# Altium PCB CAN-to-CAN.PcbDoc
Units mil, origin at the board's own origin, x right, y up, seen from the top; angles counter-clockwise.
Board outline 4580 x 2040 mil, 4 copper layers (Top Layer, GND, +5V, Bottom Layer), stack 23.756 mil thick; 112 components, 87 nets, 365 pads, 138 vias.
Unrouted connection lines stored in the file: 3.
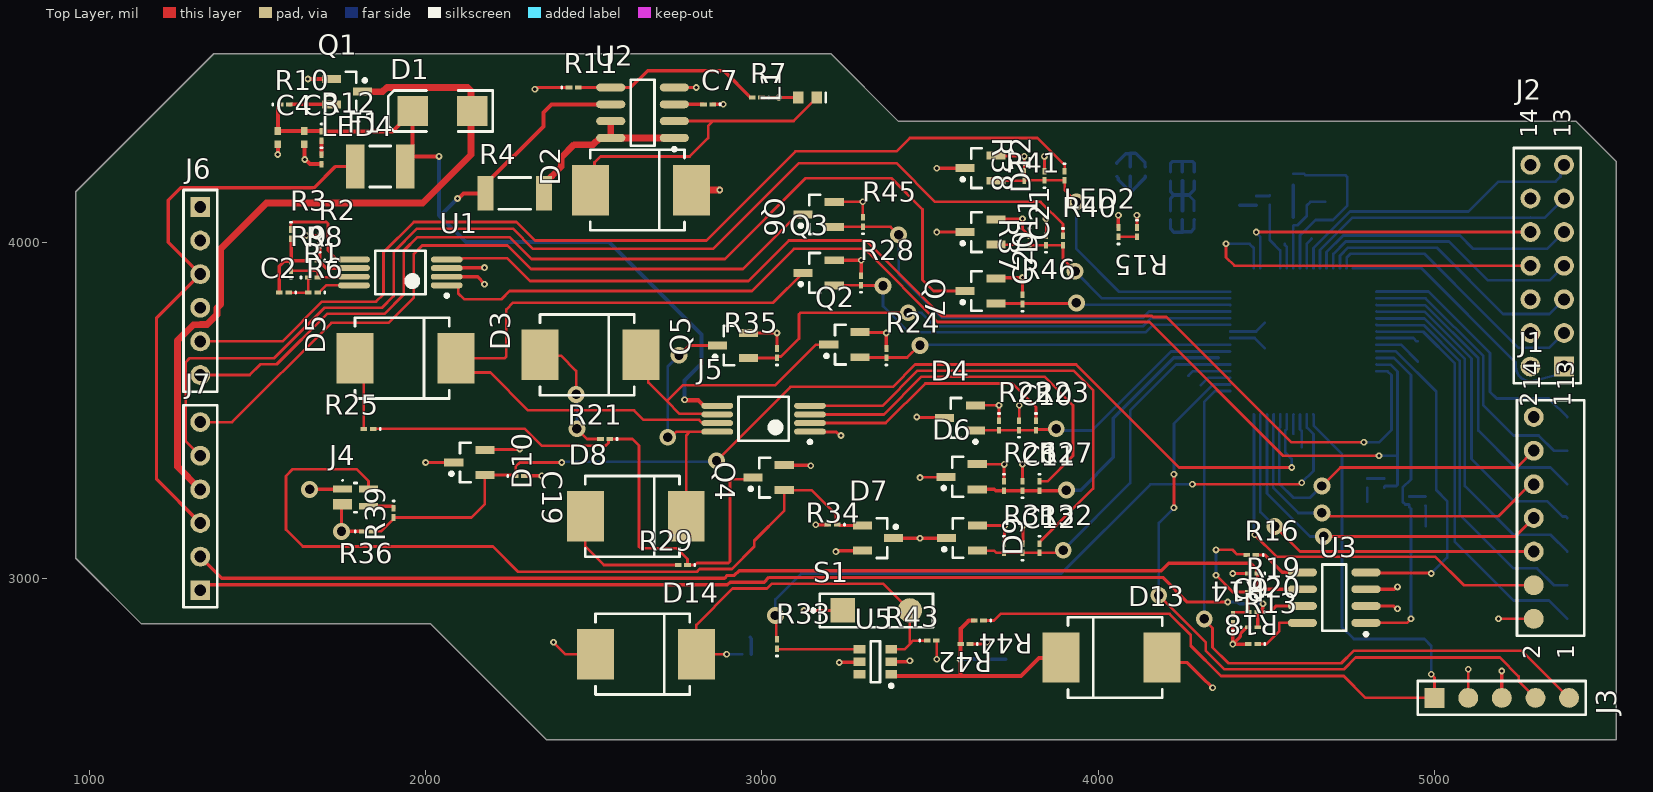
[diagram p0: Top Layer view]
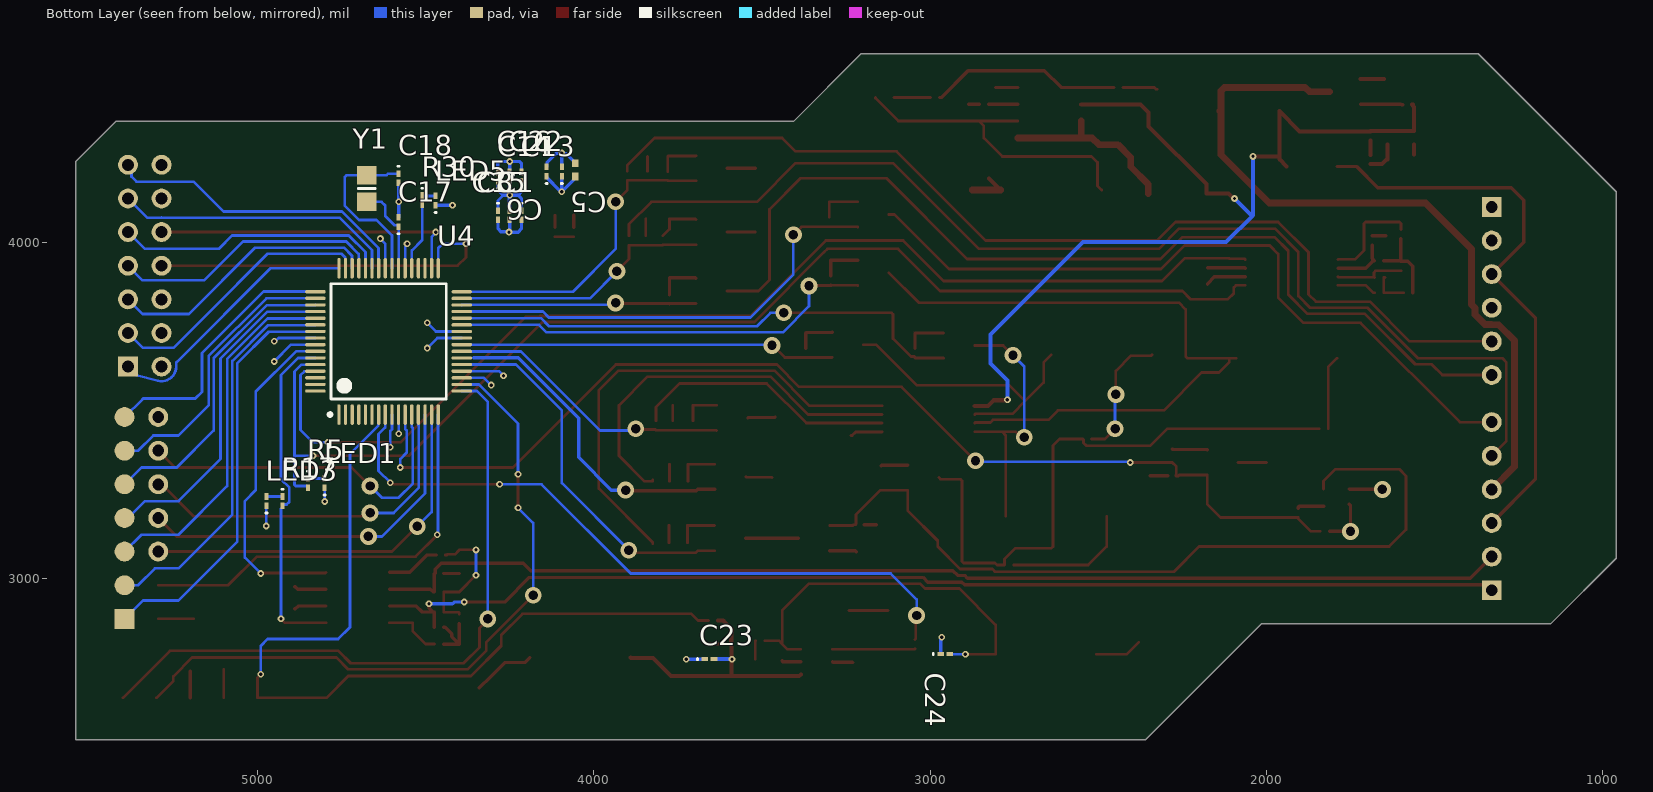
[diagram p1: Bottom Layer view, seen from below]
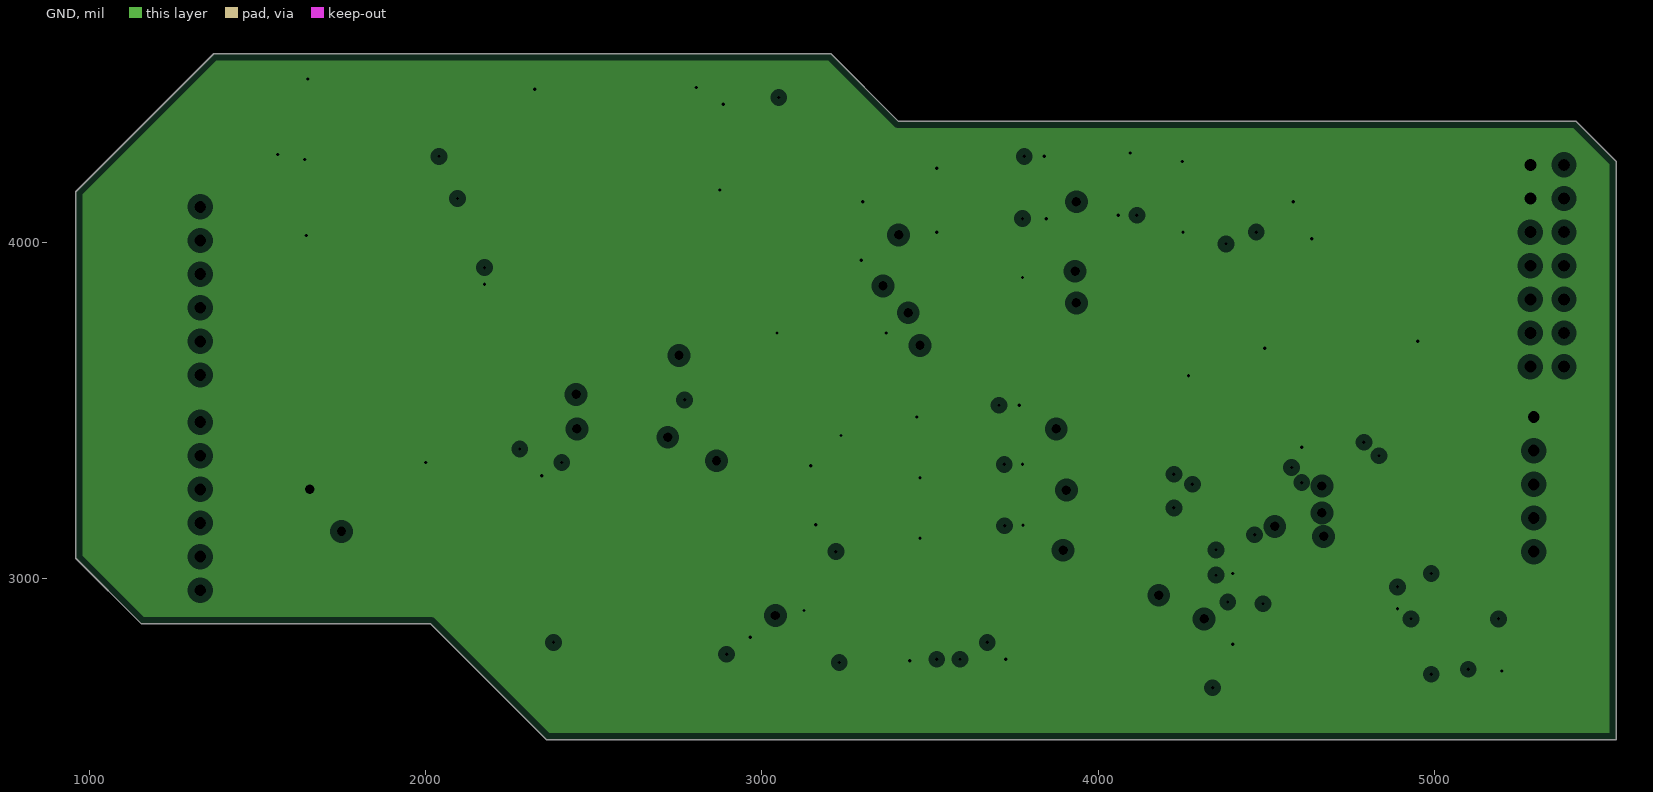
[diagram p2: GND, clearances drawn from the general rule]
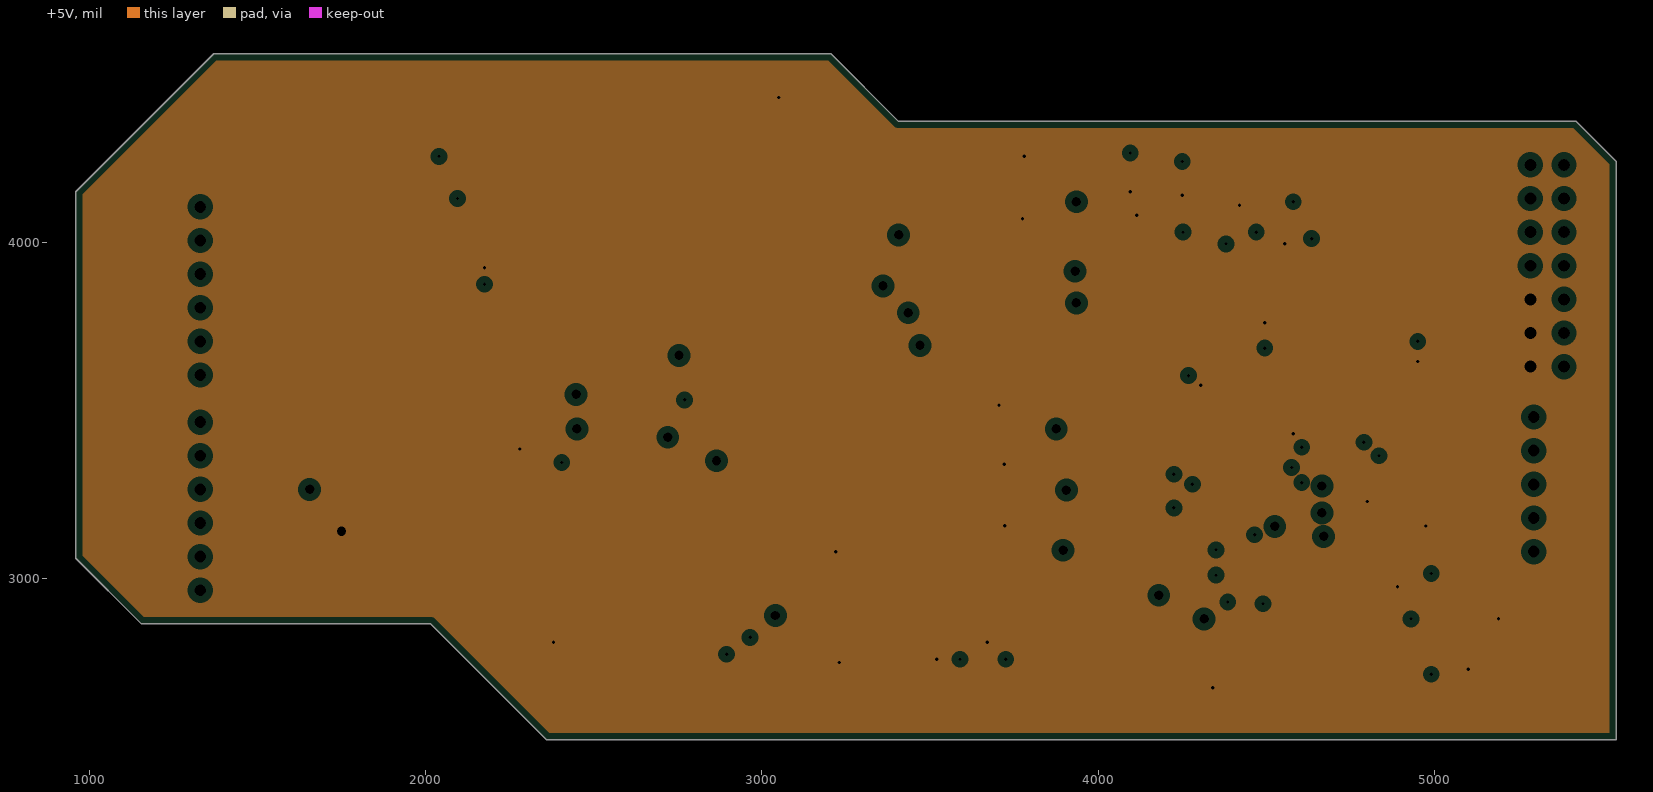
[diagram p3: +5V, clearances drawn from the general rule]

## Layer stack, top to bottom
Top Solder: solder mask 0.4, Solder Resist, Dk 3.5
Top Layer: signal copper 1.4
Dielectric 2: prepreg 2.8, PP-006, Dk 4.1
GND: plane copper 1.3779, net GND
Dielectric 1: dielectric 12.6, FR-4, Dk 4.8
+5V: plane copper 1.3779, net +5V
Dielectric 3: prepreg 2.8, PP-006, Dk 4.1
Bottom Layer: signal copper 1.4
Bottom Solder: solder mask 0.4, Solder Resist, Dk 3.5

## Board outline
1155,2865 960,3060 960,4150 1370,4560 3205,4560 3405,4360 5420,4360 5540,4240 5540,2520 2360,2520 2015,2865

## Design rules (kind name [scope] priority, off if disabled: settings)
Clearance [All] p1: gap=10 ignorepadtopadclearanceinfootprint=FALSE except(0: Arc-Hole Track-Hole SMDPad-Hole THPad-Hole Via-Hole Fill-Hole Poly-Hole Region-Hole Text-Hole)
PlaneClearance [All] p1: clearance=20
PlaneConnect [All] p1: planeconnectstyle=Relief reliefexpansion=20 reliefentries=4 reliefconductorwidth=10 reliefairgap=10
PolygonConnect [All] p1: connectstyle=Relief reliefconductorwidth=10 reliefentries=4 polygonreliefangle="90 Angle" airgapwidth=10
RoutingVias [All] p1: holewidth=28 width=50 viastyle="Through Hole" minholewidth=28 minwidth=50 maxholewidth=28 maxwidth=50
SolderMaskExpansion [All] p1: expansion=4 istentingtop=FALSE
Width [All] p1: maxlimit=30 minlimit=5 preferedwidth=10 minimp=50.000000 maximp=50.000000 favimp=50.000000
28 further rules are at their usual default settings.

## Components (designator, comment, footprint, x,y, rotation, side; value= is the part's Value field where it differs from the comment)
C1 "100n" 0603 4285,4080 r270 bottom
C2 "4n7" 0603 1578.78,3850 r180 top value=100n
C3 "100n" 0402 1639.55,4310.77 r270 top
C4 "10u/16" 0402 1560.74,4310.77 r270 top value=470u/16
C5 "100u/6V3" 0402 4055,4215 r90 bottom value=470u/16
C6 "100n" 0603 4250,4195 r90 bottom
C7 "100p" 0603 2840,4410 r180 top value=100pF
C8 "100n" 0603 4250,4080 r270 bottom
C9 "4n7" 0603 4400,2880 r90 top value=100n
C10 "100n" 0603 3765,3455 r90 top
C11 "100n" 0603 3775,3275 r90 top
C12 "100n" 0603 3775,3090 r90 top
C13 "100n" 0603 4215,4195 r90 bottom
C14 "100n" 0603 4285,4195 r90 bottom
C15 "100n" 0603 4215,4080 r270 bottom
C16 "100n" 0603 4140,4210 r90 bottom
C17 "27p" 0603 4580,4060 r90 bottom value=100n
C18 "27p" 0603 4580,4190 r270 bottom value=100n
C19 "100n" 0603 2280,3305 r0 top
C20 "100n" 0603 3845,4005 r90 top
C21 "100n" 0603 3840,4197.44 r90 top
C22 "100n" 0603 4095,4210 r90 bottom
C23 "100n" 0603 3656.22,2760 r180 bottom
C24 "10n" 0603 2955,2775 r180 bottom value=100pF
D1 "P6SMB15A" SMB 2050,4390 r180 top
D2 "LL5817" DIODE_SMC 2640,4155 r180 top
D3 "LL4148" DIODE_SMC 2490,3665 r180 top
D4 "BAT54S" SOT-23_M 3588.74,3477.4 r180 top
D5 "LL4148" DIODE_SMC 1940,3655 r180 top
D6 "BAT54S" SOT23_M#1 3593.74,3302.4 r180 top
D7 "BAT54S" SOT23_M#1 3345,3120 r0 top
D8 "LL4148" DIODE_SMC 2625,3185 r180 top
D9 "BAT54S" SOT23_M#1 3595,3120.25 r180 top
D10 "BAT54S" SOT23_M#1 2130,3345 r180 top
D11 "BAT54S" SOT23_M#1 3650,4030 r180 top
D12 "BAT54S" SOT23_M#1 3650,4220 r180 top
D13 "LL4148" DIODE_SMC 4040,2765 r0 top
D14 "LL4448" DIODE_SMC 2655,2775 r180 top
F1 "Fuse 1" 1812 1865,4225 r0 top
J1 "Header 7X2" HDR2X7#1 5395,2880 r90 top
J2 "Header 7X2" HDR2X7#2 5385,3630 r90 top
J3 "ZL201" HDR1X5 5000,2645 r0 top
J4 "MX-43045-0400" SOT-343_M 1791.62,3240.59 r0 top
J5 "MX-43045-0800" DB008_M 3005,3475 r180 top
J6 "MX-43045-0600" HDR1X6 1330,4105 r270 top
J7 "MX-43045-0600" HDR1X6 1330,2965 r90 top
L1 "DL22-330" INDC1608L 3135,4430 r180 top value=100uH
LED1 "HCL-1904AYL" 0603 4800,3283.78 r90 bottom
LED2 "HCL-1903BG4" 0603 4115,4030 r270 top
LED3 "HCL-1906BR1" 0603 4973.09,3230 r90 bottom
LED4 "HCL-1904AYL" 0603 1690.74,4245.77 r270 top
LED5 "HCL-1906BR1" 0603 4470,4123.78 r90 bottom
Q1 "BSS138" SOT23_M#2 1766.26,4447.4 r0 top
Q2 "BSS123" SOT23_M#1 3245,3695.25 r180 top
Q3 "BSS123" SOT23_M#1 3168.74,3908.82 r180 top
Q4 "BSS123" SOT23_M#1 3020,3300 r180 top
Q5 "BSS123" SOT23_M#1 2913.74,3692.65 r180 top
Q6 "BSS123" SOT23_M#1 3168.74,4082.4 r180 top
Q7 "BSS123" SOT23_M#1 3650,3855 r180 top
R1 "CAN0001" 0603 1665,3895 r0 top
R2 "CAN0001" 0603 1685,4005 r90 top
R3 "nc" 0603 1600,4023.78 r270 top value=1K
R4 "1R" 12Z-2010 2265,4145 r180 top value=1K
R5 "4k7" 0603 4850,3283.78 r270 bottom value=1K
R6 "1k" 0603 1665,3850 r180 top value=1K
R7 "3k6 1%" 0603 2985,4430 r180 top value=1K
R8 "68" 0603 1665,3945 r180 top value=1K
R9 "68" 0603 1600,3928.78 r90 top value=1K
R10 "1M" 0603 1581.22,4408.81 r0 top value=1K
R11 "1k2 1%" 0603 2440,4460 r0 top value=1K
R12 "4k7" 0603 1690.74,4315.77 r270 top value=1K
R13 "CAN0001" 0603 4460,2855 r0 top
R14 "CAN0001" 0603 4460,3015 r180 top
R15 "1k8" 0603 4060,4030 r90 top value=1K
R16 "nc" 0603 4455,3070 r180 top value=1K
R17 "4k7" 0603 4925,3230 r270 bottom value=1K
R18 "1k" 0603 4460,2805 r180 top value=1K
R19 "68" 0603 4460,2960 r180 top value=1K
R20 "68" 0603 4460,2900 r180 top value=1K
R21 "10k" 0603 2533.78,3415 r180 top value=1K
R22 "10k" 0603 3705,3455 r270 top value=1K
R23 "1k" 0603 3815,3455 r270 top value=1K
R24 "4k7" 0603 3370,3670 r90 top value=1K
R25 "10k" 0603 1830,3445 r180 top value=1K
R26 "10k" 0603 3720,3275 r270 top value=1K
R27 "1k" 0603 3825,3275 r270 top value=1K
R28 "4k7" 0603 3295,3886.22 r90 top value=1K
R29 "10k" 0603 2765,3040 r180 top value=1K
R30 "1k8" 0603 4510,4125 r270 bottom value=1K
R31 "10k" 0603 3720,3090 r270 top value=1K
R32 "1k" 0603 3825,3090 r270 top value=1K
R33 "nc" 0603 3045,2805 r90 top value=1K
R34 "4k7" 0603 3210,3160 r180 top value=1K
R35 "4k7" 0603 3045,3670 r90 top value=1K
R36 "10k" 0603 1826.22,3140 r0 top value=1K
R37 "10k" 0603 3795,4005 r270 top value=1K
R38 "10k" 0603 3780,4196.22 r270 top value=1K
R39 "470" 0603 1905,3195 r270 top value=1K
R40 "1k" 0603 3895,4005 r270 top value=1K
R41 "1k" 0603 3900,4197.44 r270 top value=1K
R42 "4k7" 0603 3605,2805 r180 top value=1K
R43 "10k" 0603 3505,2815 r0 top value=1K
R44 "4k7" 0603 3645,2875 r180 top value=1K
R45 "4k7" 0603 3300,4060 r90 top value=1K
R46 "4k7" 0603 3775,3830 r90 top value=1K
S1 "DTSM32NB" SPST-2 3340,2905 r0 top
U1 "MCP2551-I/SN" DB008_M 1925,3910 r180 top
U2 "MC33063AD" SO8_N 2645,4385 r180 top
U3 "MCP2551-I/SN" SO8_N 4701.65,2943.03 r180 top
U4 "PIC30F5011" ST-64-2_L 4610,3705 r90 bottom
U5 "MCP1320-46LT" SOT23-6_L 3337.25,2752.6 r180 top
Y1 "10MHz" 6-0805_M 4675,4159.37 r270 bottom

## Footprints (in the part's own frame and the unit in brackets; to place one, negate y for a bottom-side part, rotate by r counter-clockwise, add the part's x,y. Pads: shape width x height; smd on the part's side, far side on the other; paste and mask are expansions set on the pad)
6-0805_M [mm] "Chip Resistor, Body 2.0x1.2mm, IPC Low Density"
  rect 1.4x1.5 smd: 1(-1,0) 2(1,0)
  silkscreen extent 0,-0.65 0,0.65, body extent -1.07,-0.7 1.07,0.7, height 0.7
12Z-2010 [mm] "Chip Resistor, Body 5.0x2.5mm, IPC High Density"
  rect 1.2x2.6 smd: 1(-2.2,0) 2(2.2,0)
  silkscreen extent -1.2,-1.2 1.2,1.2, body extent -2.58,-1.33 2.58,1.33, height 0.9
0402 [mm] "Chip Capacitor, Body 1.0x0.5mm, IPC High Density"
  rect 0.6x0.5 smd: 1(-0.5,0) 2(0.5,0)
  body extent -0.55,-0.3 0.55,0.3, height 1.3
0603 [mm] "Chip Inductor, Body 0.6x0.3mm, IPC High Density"
  rect 0.5x0.3 smd: 1(-0.35,0) 2(0.35,0)
  silkscreen extent -0.9,-0.05 -0.9,0.05, body extent -0.33,-0.18 0.33,0.18, height 0.55
1812 [mm] "Chip Capacitor, Body 4.5x3.2mm, IPC High Density"
  rect 1.4x3.3 smd: 1(-1.9,0) 2(1.9,0)
  silkscreen extent -0.8,-1.55 0.8,1.55, body extent -2.4,-1.7 2.4,1.7, height 1.4
DB008_M [mm] "SOP, 8-Leads, Body 3x5.3mm, Pitch 0.65mm, IPC Low Density"
  oval 2.4x0.45 smd: 1(-3.5,0.975) 2(-3.5,0.325) 3(-3.5,-0.325) 4(-3.5,-0.975) 5(3.5,-0.975) 6(3.5,-0.325) 7(3.5,0.325) 8(3.5,0.975)
  silkscreen extent -3.63,-1.65 1.9,1.87, body extent -2.8,-1.65 2.8,1.65, height 2
DIODE_SMC [mil] "Diode; 2 Leads"
  rect 110x150 smd: 1(-150,0) 2(150,0)
  silkscreen extent -130,-120 150,120
HDR1X5 [mm] "Connector; Header; 5 Position"
  rect 1.5x1.5 smd: 1(0,0)
  round 1.5 smd: 2(2.54,0) 3(5.08,0) 4(7.62,0) 5(10.16,0)
  silkscreen extent -1.27,-1.27 11.43,1.27
HDR1X6 [mm] "Connector; Header; 6 Position"
  rect 1.5x1.5 hole 0.9: 1(0,0)
  round 1.5 hole 0.9: 2(2.54,0) 3(5.08,0) 4(7.62,0) 5(10.16,0) 6(12.7,0)
  silkscreen extent -1.27,-1.27 13.97,1.27
HDR2X7#1 [mm] "Connector; Header; 7x2 Position"
  rect 1.5x1.5 smd far side: 1(0,0)
  round 1.5 smd: 2(0,2.54) 4(2.54,2.54)
  round 1.5 smd far side: 3(2.54,0) 5(5.08,0) 7(7.62,0) 9(10.16,0) 11(12.7,0) 13(15.24,0)
  round 1.5 hole 0.9: 6(5.08,2.54) 8(7.62,2.54) 10(10.16,2.54) 12(12.7,2.54) 14(15.24,2.54)
  silkscreen extent -1.27,-1.27 16.51,3.81
HDR2X7#2 [mm] "Connector; Header; 7x2 Position"
  rect 1.5x1.5 hole 0.9: 1(0,0)
  round 1.5 hole 0.9: 2(0,2.54) 3(2.54,0) 4(2.54,2.54) 5(5.08,0) 6(5.08,2.54) 7(7.62,0) 8(7.62,2.54) 9(10.16,0) 10(10.16,2.54) 11(12.7,0) 12(12.7,2.54) 13(15.24,0) 14(15.24,2.54)
  silkscreen extent -1.27,-1.27 16.51,3.81
INDC1608L [mm] "Chip Inductor, Body 1.6x0.8mm, IPC High Density"
  rect 0.8x0.9 smd: 1(-0.7,0) 2(0.7,0)
  silkscreen extent -1.4,-0.35 -1.4,0.35, body extent -0.87,-0.48 0.87,0.48, height 0.55
SMB [mm] "DO-214-AA/SMB; 2 C-Bend Leads; Body 5.3 x 3.6 mm, inc. leads (LxW)"
  rect 2.3x2.3 smd: 1(-2.25,0) 2(2.25,0)
  silkscreen extent -3.8,-1.55 4.1,1.55
SO8_N [mm] "SOIC, 8-Leads, Body 4.9x3.9mm, Pitch 1.27mm, IPC Medium Density"
  oval 2.2x0.6 smd: 1(-2.4,1.905) 2(-2.4,0.635) 3(-2.4,-0.635) 4(-2.4,-1.905) 5(2.4,-1.905) 6(2.4,-0.635) 7(2.4,0.635) 8(2.4,1.905)
  silkscreen extent -2.53,-2.5 0.9,2.88, body extent -2,-2.5 2,2.5, height 1.75
SOT23-6_L [mm] "SOT23, 6-Leads, Body 2.9x1.6mm, Pitch 0.95mm, Lead Span 2.7mm, IPC High Density"
  rect 0.9x0.65 smd: 1(-1.2,0.95) 2(-1.2,0) 3(-1.2,-0.95) 4(1.2,-0.95) 5(1.2,0) 6(1.2,0.95)
  silkscreen extent -1.33,-1.55 0.35,1.95, body extent -0.9,-1.55 0.9,1.55, height 1.45
SOT23_M#1 [mm] "SOT23, 3-Leads, Body 2.9x1.3mm, Pitch 0.95mm, Lead Span 2.3mm - Reverse Pinning, IPC Low Density"
  rect 1.45x0.6 smd: 1(1.175,0) 2(-1.175,-0.95) 3(-1.175,0.95)
  silkscreen extent -0.1,-1.5 1.47,1.5, body extent -0.7,-1.5 0.7,1.5, height 1.1
SOT23_M#2 [mm] "SOT23, 3-Leads, Body 2.9x1.3mm, Pitch 0.95mm, Lead Span 2.3mm - Reverse Pinning, IPC Low Density"
  rect 1.45x0.6 smd: 1(1.175,0) 2(-1.175,0.95) 3(-1.175,-0.95)
  silkscreen extent -0.1,-1.5 1.48,1.5, body extent -0.7,-1.5 0.7,1.5, height 1.1
SOT-23_M [mm] "SOT23, 3-Leads, Body 2.9x1.3mm, Pitch 0.95mm, Lead Span 2.5mm, IPC Low Density"
  rect 1.45x0.6 smd: 1(1.175,0) 2(-1.175,-0.95) 3(-1.175,0.95)
  silkscreen extent -1.3,-1.5 0.7,1.92, body extent -0.7,-1.5 0.7,1.5, height 1.1
SOT-343_M [mm] "SOT343, 4-Leads, Body 2x1.3 mm, Pitch 1.3mm, Lead Span 2.1mm, IPC Low Density"
  rect 1.45x0.5 smd: 1(-0.975,0.65) 3(0.975,-0.65) 4(0.975,0.65)
  rect 1.45x0.8 smd: 2(-0.975,-0.5)
  silkscreen extent -1.02,-1.1 0.1,1.35, body extent -0.7,-1.1 0.7,1.1, height 1
SPST-2 [mm] "Switch; 2 Leads"
  rect 1.85x1.85 smd: 1(-2.54,0)
  round 1.85 smd: 2(2.54,0)
  silkscreen extent -4.89,-1.27 4.28,1.27
ST-64-2_L [mm] "Thin QFP, 64-Leads, Body 10x10mm, Pitch 0.5mm, IPC High Density"
  oval 1.55x0.25 smd: 1(-5.525,3.75) 2(-5.525,3.25) 3(-5.525,2.75) 4(-5.525,2.25) 5(-5.525,1.75) 6(-5.525,1.25) 7(-5.525,0.75) 8(-5.525,0.25) 9(-5.525,-0.25) 10(-5.525,-0.75) 11(-5.525,-1.25) 12(-5.525,-1.75) 13(-5.525,-2.25) 14(-5.525,-2.75) 15(-5.525,-3.25) 16(-5.525,-3.75) 33(5.525,-3.75) 34(5.525,-3.25) 35(5.525,-2.75) 36(5.525,-2.25) 37(5.525,-1.75) 38(5.525,-1.25) 39(5.525,-0.75) 40(5.525,-0.25) 41(5.525,0.25) 42(5.525,0.75) 43(5.525,1.25) 44(5.525,1.75) 45(5.525,2.25) 46(5.525,2.75) 47(5.525,3.25) 48(5.525,3.75)
  oval 0.25x1.55 smd: 17(-3.75,-5.525) 18(-3.25,-5.525) 19(-2.75,-5.525) 20(-2.25,-5.525) 21(-1.75,-5.525) 22(-1.25,-5.525) 23(-0.75,-5.525) 24(-0.25,-5.525) 25(0.25,-5.525) 26(0.75,-5.525) 27(1.25,-5.525) 28(1.75,-5.525) 29(2.25,-5.525) 30(2.75,-5.525) 31(3.25,-5.525) 32(3.75,-5.525) 49(3.75,5.525) 50(3.25,5.525) 51(2.75,5.525) 52(2.25,5.525) 53(1.75,5.525) 54(1.25,5.525) 55(0.75,5.525) 56(0.25,5.525) 57(-0.25,5.525) 58(-0.75,5.525) 59(-1.25,5.525) 60(-1.75,5.525) 61(-2.25,5.525) 62(-2.75,5.525) 63(-3.25,5.525) 64(-3.75,5.525)
  silkscreen extent -5.65,-4.35 4.35,4.55, body extent -5,-5 5,5, height 1.6

## Part data
C1 C2 C3 C6 C7 C8 C9 C10 C11 C12 C13 C14 C15 C16 C17 C18 C19 C20 C21 C22 C23 C24: library part Cap, "Capacitor", LatestRevisionDate=17-Jul-2002, LatestRevisionNote="Re-released for DXP Platform.", PackageReference=RAD-0.3, Published=8-Jun-2000, Publisher="Altium Limited"
C4 C5: library part "Cap Pol1", "Polarized Capacitor (Radial)", LatestRevisionDate=17-Jul-2002, LatestRevisionNote="Re-released for DXP Platform.", PackageReference=RB7.6-15, Published=8-Jun-2000, Publisher="Altium Limited"
D1: library part "D Zener", "Zener Diode", LatestRevisionDate=17-Jul-2002, LatestRevisionNote="Re-released for DXP Platform.", PackageReference=DIODE-0.7, Published=8-Jun-2000, Publisher="Altium Limited"
D2 D3 D5 D8 D13: library part 1N4148, "High Conductance Fast Diode", Code_JEDEC=DO-204-AH, ComponentLink1Description="Manufacturer Link", ComponentLink1URL=http://www.fairchildsemi.com/, ComponentLink2Description=Datasheet, ComponentLink2URL=http://www.fairchildsemi.com/ds/1N%2F1N4148.pdf, DatasheetDocument=1997, LatestRevisionDate=17-Jul-2002, LatestRevisionNote="Re-released for DXP Platform.", PackageReference=DO-35, Published=8-Jun-2000, Publisher="Altium Limited"
D4 D6 D7 D9 D10 D11 D12: "Schottky Barrier Double Diode", ComponentLink1Description="Manufacturer Link", ComponentLink1URL=http://www.semiconductors.philips.com/, ComponentLink2Description=Datasheet, ComponentLink2URL=http://www.semiconductors.philips.com/acrobat/datasheets/BAT54_SERIES_4.pdf, DatasheetVersion=4-Mar-2002, LatestRevisionDate=12-Dec-2006, LatestRevisionNote="IPC-7351 Footprint Added.", PackageDescription="3-Pin SOT-23 Package 0.95 mm Pitch, 2.3 mm Lead Span", PackageReference=SOT23, PackageVersion=May-1999, Published=17-Sep-2003, Publisher="Altium Limited"
D14: library part Diode, "Default Diode", PackageDocument=Sep-1996, Code_JEDEC=DO-214-AB, LatestRevisionDate=17-Jul-2002, LatestRevisionNote="Re-released for DXP Platform.", PackageReference=SMC, Published=8-Jun-2000, Publisher="Altium Limited"
F1: "Fuse", LatestRevisionDate=17-Jul-2002, LatestRevisionNote="Re-released for DXP Platform.", PackageReference=PIN-W2/E2.8, Published=8-Jun-2000, Publisher="Altium Limited"
J1 J2: "Header, 7-Pin, Dual row", LatestRevisionDate=17-Jul-2002, LatestRevisionNote="Re-released for DXP Platform.", Publisher="Altium Limited"
J3: library part CON5, "Connector"
J4: library part "Header 2X2", "Header, 2-Pin, Dual row", LatestRevisionDate=17-Jul-2002, LatestRevisionNote="Re-released for DXP Platform.", Publisher="Altium Limited"
J5: library part "Header 4X2A", "Header, 4-Pin, Dual row", LatestRevisionDate=17-Jul-2002, LatestRevisionNote="Re-released for DXP Platform.", Publisher="Altium Limited"
J6 J7: library part "Header 6", "Header, 6-Pin", LatestRevisionDate=17-Jul-2002, LatestRevisionNote="Re-released for DXP Platform.", Publisher="Altium Limited"
L1: library part "Inductor Iron", "Magnetic-Core Inductor", Published=24-Mar-1999, Publisher="Altium Limited", Revision="July-2002: Re-released for DXP Platform."
LED1 LED2 LED3 LED4 LED5: library part LED3, "Typical BLUE SiC LED", Published=8-Jun-2000, Publisher="Altium Limited", Revision 1="Jul-2002: Re-released for DXP Platform.", Revision 2="17-Dec-2003: PCB Footprint replaced."
Q1: "N-Channel Enhancement Mode Vertical DMOS FET", ComponentLink1Description="Manufacturer Link", ComponentLink1URL=http://www.zetex.com/, ComponentLink2Description=Datasheet, ComponentLink2URL=www.zetex.com/3.0/pdf/BSS138.pdf, DatasheetVersion=Mar-96, PackageDescription="SOT-23; 3 Leads; Body 3.1 x 2.5 mm, inc. leads (LxW max), Alternate Lead Configuration", PackageReference=SOT23, PackageVersion=1996, Published=17-Dec-2003, Publisher="Altium Limited"
Q2 Q3 Q4 Q5 Q6 Q7: "N-channel Enhancement Mode Vertical D-MOSFET", ComponentLink1Description="Manufacturer Link", ComponentLink1URL=http://www.semiconductors.philips.com/, ComponentLink2Description=Datasheet, ComponentLink2URL=http://www.semiconductors.philips.com/acrobat/datasheets/BSS123_3.pdf, DatasheetVersion=Apr-1995, LatestRevisionDate=12-Dec-2006, LatestRevisionNote="IPC-7351 Footprint Added.", PackageDescription="3-Pin SOT-23 Package 0.95 mm Pitch, 2.3 mm Lead Span", PackageReference=SOT23, PackageVersion=May-1999, Published=17-Sep-2003, Publisher="Altium Limited"
R1 R2 R13 R14: library part "Res Varistor", "Varistor (Voltage-Sensitive Resistor)", LatestRevisionDate=04-Mar-2005, LatestRevisionNote="PCB Footprint replaced.", PackageReference=6-0805, Published=24-Mar-1999, Publisher="Altium Limited"
R3 R4 R5 R6 R7 R8 R9 R10 R11 R12 R15 R16 R17 R18 R19 R20 R21 R22 R23 R24 R25 R26 R27 R28 R29 R30 R31 R32 R33 R34 R35 R36 R37 R38 R39 R40 R41 R42 R43 R44 R45 R46: library part Res2, "Resistor", LatestRevisionDate=17-Jul-2002, LatestRevisionNote="Re-released for DXP Platform.", PackageReference=AXIAL-0.4, Published=8-Jun-2000, Publisher="Altium Limited"
S1: library part PUSHB, "Switch PushButton"
U1 U3: "High Speed CAN Transceiver, 8-Pin Plastic SOIC, Industrial Grade", Code_JEDEC=MS-012, ComponentLink1Description="Manufacturer Link", ComponentLink1URL=http://www.microchip.com, ComponentLink2Description=Datasheet, ComponentLink2URL=http://ww1.microchip.com/downloads/en/DeviceDoc/21667d.pdf, DatasheetVersion=Nov-2003, LatestRevisionDate=13-Apr-2006, LatestRevisionNote="IPC-7351 Footprint Added.", PackageDescription="8-Pin Plastic Narrow Body Small Outline Integrated Circuit 1.27 mm Pitch", PackageReference=SOIC150-8, PackageVersion=Oct-2005, Published=6-Oct-2005, Publisher="Altium Limited"
U2: "DC-to-DC Converter Control Circuit", Code_IPC=SOIC127P600-8, Code_JEDEC=MS-012-AA, ComponentLink1Description="Manufacturer Link", ComponentLink1URL=http://www.onsemi.com/site/products/taxonomy/0,4438,503,00.html, ComponentLink2Description=Datasheet, ComponentLink2URL=http://www.onsemi.com/pub/Collateral/MC34063A-D.PDF, DatasheetVersion=1988, LatestRevisionDate=13-Apr-2006, LatestRevisionNote="IPC-7351 Footprint Added.", PackageDescription="8-Pin Small Outline Integrated Circuit 1.27 mm Pitch", PackageReference=751-02, Published=17-Jul-2002, Publisher="Altium Limited"
U4: "PIC30F5011 - Up"
U5: library part MCP1320
Y1: library part XTAL, "Crystal Oscillator", LatestRevisionDate=17-Jul-2002, LatestRevisionNote="Re-released for DXP Platform.", PackageReference=R38, Published=8-Jun-2000, Publisher="Altium Limited"

## Via types
v1: diameter 20, hole 10, Top Layer to GND, 35 vias
v2: diameter 20, hole 10, Top Layer to Bottom Layer, 23 vias
v3: diameter 20, hole 10, Top Layer to +5V, 19 vias
v4: diameter 50, hole 28, Top Layer to GND, 16 vias
v5: diameter 50, hole 28, GND to Bottom Layer, 16 vias
v6: diameter 20, hole 10, GND to Bottom Layer, 11 vias
v7: diameter 20, hole 10, +5V to Bottom Layer, 10 vias
v8: diameter 50, hole 28, Top Layer to Bottom Layer, 8 vias

## Nets (pads, with @x,y where several pads share a name; then routed paths per layer and width w, separated by ;. In a path a pad name is that pad's centre, name@x,y a point inside that pad or via, vN(x,y) a via of type N, cw(c..) or ccw(c..) an arc to the next point about the centre after c; other vN are vias at no path point)
+5V: C1.1 C5.1 C6.1 C8.1 C13.1 C14.1 C15.1 C16.1 C22.1 D4.2 D6.2 D7.2 D9.2 D10.2 D11.2 D12.2 D13.2 D14.2 J1.2 J2.2 J2.4 J2.6 J3.2 J4.2 L1.2 LED1.1 LED2.1 LED3.1 LED5.1 R7.1 R22.1 R26.1 R31.1 R36.1 R37.1 R38.1 R42.1 R43.2 U1.3 U3.3 U4.10 U4.19 U4.26 U4.38 U4.57 U5.5 | length 3160.5
  Top Layer w8: v3@2380,2810 2415,2775 D14.2 ; R7.1 v3(3050,4430) L1.2 ; R43.2 3520,2813.78 v3(3520,2760) ; R42.1 3665,2805 v3@3670,2810 ; D4.2 3635.1,3514.9 3704.9,3514.9 v3(3705,3515) R22.1 ; D6.2 3719.8,3339.8 3720,3340 R26.1 ; D9.2 3721.06,3157.65 3721.26,3157.84 R31.1@3721.26,3106.62 ; D11.2 3697.56,4068.7 3773.7,4068.7 v3(3775,4070) 3775,4038.78 R37.1 ; D12.2 3697.46,4256.2 3778.8,4256.2 v3(3780,4255) R38.1 ; LED2.1 v3(4115,4080) ; J3.2 v3(5100,2730) ; v3(5190,2880) J1.2
  Top Layer w10: v8@1751.18,3138.82 v8(1750,3140) ; J4.2 1750,3217.68 v8(1750,3140) ; R36.1 v8(1750,3140) ; U1.3 2063.9,3923.9 2174.51,3923.9 v3(2175,3924.38) ; D10.2 2177.56,3383.7 2278.7,3383.7 v3(2280,3385) ; v3(3220,3080) 3222.6,3082.6 D7.2 ; v3(3230,2750) 3231.3,2751.3 3288.7,2751.3 U5.5 ; D13.2 4205,2750 4265,2750 4306.54,2708.46 v3(4340,2675) ; U3.3 4880.33,2968.03 4887.29,2975 v3(4890,2975)
  Bottom Layer w8: 4268.54,4140 4285,4123.54 C1.1 ; v7(4305,3575) 4326.73,3596.73 U4.19 ; U4.26 4469.53,3734.53 v7(4495,3760) ; v7(4555,3995) 4555,3991.75 4560.79,3985.96 U4.38 ; v7(4580,3430) 4580.24,3430.24 4580.24,3487.24 U4.10 ; v7(4800,3228.78) LED1.1 ; U4.57 4899.84,3695.16 v7(4950,3645) ; LED3.1 4974.05,3215.27 v7(4974.05,3155.95)
  Bottom Layer w10: C5.1 4059.84,4190.47 4059.84,4185.16 v7(4095,4150) ; C22.1 v7(4095,4150) ; C16.1 4140,4192.28 4099.63,4151.91 4096.91,4151.91 v7(4095,4150) ; C15.1 4215,4130 4225,4140 4215,4150 C13.1 ; 4268.54,4140 4285,4156.47 C14.1 ; v7(4420,4110) LED5.1
  Bottom Layer w12: 4225,4140 v7(4250,4140) ; C8.1 v7(4250,4140) ; C6.1 4250,4142.07 v7@4252.07,4140 ; 4268.54,4140 v7@4252.07,4140 ; v7(4250,4140) v7@4252.07,4140
  other v3: 2380.1,2810.1 3670.1,2810.1 3721.66,3157.05 3720.4,3339.2
+12V: C3.1 C4.1 D1.2 F1.2 J5.5 R4.2 R10.1 R12.1 U2.6 | length 2878.6
  Top Layer w12: R10.1 1563.69,4408.81 1563.6,4408.72 1563.6,4404.64 1560.74,4401.78 C4.1 C3.1 1640,4330 1690.64,4330 1690.74,4329.91 R12.1 1900.96,4329.55 D1.2 1961.42,4290.99 1961.36,4290.94 F1.2@1961.36,4246.56 ; F1.2 F1.2@1961.36,4246.56 ; v2(2040,4255) 1961.36,4255 F1.2@1961.36,4246.56 ; v2(2095,4130) 2097.16,4130 2112.16,4145 R4.2 2178.39,4172.56 2350,4344.17 2350,4385 2375,4410 U2.6 ; v2@2770,3530 2810.66,3530 2827.27,3513.39 J5.5
  Bottom Layer w12: v2(2040,4255) 2040,4080 ; v2(2095,4130) 2045,4080 2040,4080 ; v2(2770.13,3531.15) 2770.13,3589.22 2820,3639.09 2820,3725 2545,4000 2120,4000 2040,4080
+12VPWR: F1.1 J6.3 J7.3 | length 1703.7
  Top Layer w10: J7.3 1200,3295 1200,3775 J6.3 1235,4000 1235,4125 1272.14,4162.14 1669.2,4162.14 1732.05,4225 F1.1
ADC0: J1.4 U4.16 | length 1250.7
  Top Layer w8: v2(4465,3130) 4530,3065 5001.82,3065 5086.82,2980 J1.4
  Bottom Layer w8: U4.16 4463.29,3486.55 4463.29,3131.71 v2(4465,3130)
ADC1: J1.6 U4.15 | length 1151.3
  Top Layer w8: v5(4525,3155) 4600,3080 J1.6
  Bottom Layer w8: U4.15 4482.05,3197.95 v5(4525,3155)
  other v4: 4525,3155
ADC2: J1.8 U4.14 | length 1103.4
  Top Layer w8: v5(4670,3125) 5240,3125 J1.8
  Bottom Layer w8: U4.14 4501.73,3253.27 4630,3125 v5(4670,3125)
  other v4: 4670,3125
ADC3: J1.10 U4.13 | length 1071.8
  Top Layer w8: v5(4665,3195) 4673.04,3186.96 4688.72,3186.96 4690.69,3185 5190,3185 5290,3285 J1.10
  Bottom Layer w8: U4.13 4521.07,3487.13 4521.07,3455.92 4520,3454.85 4520,3270 4595,3195 v5(4665,3195)
  other v4: 4665,3195
ADC4: J1.12 U4.12 | length 1039.2
  Top Layer w8: v4(4665,3275) 4720,3330 5245,3330 J1.12
  Bottom Layer w8: U4.12 4540.75,3487.13 4540.75,3450.15 4538,3447.4 4538,3282 4580,3240 4630,3240 v4(4665,3275)
  other v5: 4665,3275
ButD: C10.1 D4.3 R22.2 R23.2 U4.23 | length 858.9
  Top Layer w8: D4.3 3635.36,3440.36 3784.39,3440.36 3815,3440.36 R23.2 3816.91,3443.11 3873.11,3443.11 v4(3875,3445)
  Bottom Layer w8: v4(3875,3445) 3880,3440 3981.26,3440 4216.26,3675 4365.11,3675 4365.23,3675.12 U4.23@4391.89,3675.12
  other v5: 3875,3445
ButD_IN: J5.2 R23.1 | length 791.2
  Top Layer w8: J5.2 3368.01,3462.21 3485.8,3580 3745,3580 3815,3510 R23.1
ButN: C11.1 D6.3 R26.2 R27.2 U4.22 | length 950.6
  Top Layer w10: D6.3 3690.79,3265 3694.57,3261.22 R26.2 C11.1 R27.2 3903.96,3261.22 v4(3905.46,3262.72)
  Bottom Layer w10: v4(3905.46,3262.72) 3947.72,3262.72 4045,3360 4045,3476.87 4224.13,3656 4357.09,3656
  other v5: 3905.46,3262.72
ButN_IN: J5.3 R27.1 | length 1149.4
  Top Layer w8: J5.3 3362.8,3487.8 3475,3600 3840,3600 3925,3515 3925,3365 3848.78,3288.78 R27.1 R27.1@3825,3292.72
ButR: C12.1 D9.3 R31.2 R32.2 U4.21 | length 1112.8
  Top Layer w8: D9.3 3690.49,3082.84 3697.12,3076.22 R31.2 C12.1 R32.2 3887.9,3076.22 v4(3895.69,3084.01)
  Bottom Layer w8: v4(3895.69,3084.01) 4095,3283.32 4095,3500 4231.1,3636.1 U4.21
  other v5: 3895.69,3084.01
ButR_IN: J5.4 R32.1 | length 1432.1
  Top Layer w8: J5.4 3358.39,3513.39 3463,3618 3927,3618 3985,3560 3985,3267.72 3825,3107.72 R32.1
CAN_BMS_RX: U3.4 U4.58 | length 995.9
  Top Layer w8: U3.4 4797.66,3016.52 4988.48,3016.52 v2(4990,3015)
  Bottom Layer w8: U4.58 4884.98,3675.47 5005,3555.46 5005,3262.5 5037.5,3230 5037.5,3062.5 v2(4990,3015)
CAN_BMS_TX: R17.2 U3.1 U4.59 | length 1013.7
  Top Layer w8: U3.1 4918.03,2868.03 v2(4930,2880)
  Bottom Layer w8: U4.59 4827.87,3655.44 4879.56,3655.44 4930,3605 4930,3294.81 4905.09,3269.9 4905.09,3228.14 4913.29,3219.94 4923.09,3219.94 4925,3218.03 4925,3212.28 4930,3207.28 v2(4930,2880)
CAN_BMSS_H: J7.1 R13.2 R20.1 U3.7 | length 3423.5
  Top Layer w10: J7.1 1346.09,2981.09 2897.22,2981.09 2905.13,2989 3006.98,2989 3020.98,3003 4192,3003 4265,2930 v2(4385,2930) ; R13.2 R20.1 4474.15,2900.37 R20.1@4478.09,2900.37 ; v2(4490,2925) 4488.95,2923.95 4488.95,2911.23 R20.1@4478.09,2900.37 ; U3.7 4528.03,2918.03 4510.37,2900.37 R20.1@4478.09,2900.37
  Bottom Layer w10: v2(4385,2930) 4415,2930 4420,2925 v2(4490,2925)
CAN_BMSS_L: J7.2 R14.1 R19.1 U3.6 | length 3399.1
  Top Layer w10: J7.2 1393.91,3001.09 2888.94,3001.09 2896.85,3009 2918.33,3009 2932.33,3023 4188,3023 4210,3045 4453.18,3045 4471.06,3027.12 4471.06,3015.9 4471.97,3015 R14.1 R19.1 4477.72,2960 4485.75,2968.03 U3.6
CAN_MUX_RX: U1.4 U4.61 | length 3364.5
  Top Layer w8: U1.4 2064.66,3950.24 2108.97,3950.24 2110.73,3952 2243,3952 2310.31,3884.69 2960,3884.69 2960,3885 3080,4005 3310,4005 3534.5,3780.5 4159.96,3780.5 4162.96,3777.5 4202.5,3777.5 4575,3405 v2(4790,3405)
  Bottom Layer w8: v2(4790,3405) 4835,3405 4872,3442 4872,3549.49 ; U4.61 4827.87,3616.07 4860.54,3616.07 4872.03,3604.57 4872.03,3549.52
CAN_MUX_TX: R5.2 U1.1 U4.60 | length 3624.1
  Top Layer w8: U1.1 2090.94,3871.61 2096.82,3865.74 2096.82,3848.18 2115,3830 2225,3830 2250,3855 2970,3855 3095,3980 3305,3980 3314.78,3970.22 3522.5,3762.5 4152.5,3762.5 4550,3365 v2(4835,3365)
  Bottom Layer w8: U4.60 4827.87,3635.75 4869.25,3635.75 4890.03,3614.97 4890.03,3365 ; v2(4835,3365) 4890,3365 4890,3278.14 4887.07,3275.22 4853.41,3275.22 4850,3271.81 R5.2
CAN_MUXED_H: J6.1 R1.2 R9.1 U1.7 | length 205.4
  Top Layer w8: R9.1 1675,3915 1680,3910 1680,3896.22 R1.2@1679.88,3896.1 ; R1.2 R1.2@1679.88,3896.1 ; U1.7 1786.1,3896.1 R1.2@1679.88,3896.1
CAN_MUXED_L: J6.2 R2.1 R8.1 U1.6 | length 164.8
  Top Layer w10: R8.1 R8.1@1682.72,3945 ; R2.1 1685,3951.76 1683.62,3950.39 1683.62,3945.91 R8.1@1682.72,3945 ; U1.6 1704.92,3922.79 R8.1@1682.72,3945
ChrgLED: Q6.3 R45.1 U4.29 | length 1366.1
  Top Layer w8: Q6.3 3215.61,4045.61 3382.6,4045.61 v4(3406.4,4021.81)
  Bottom Layer w8: v4(3406.4,4021.81) 3406.4,3903.28 3533.69,3776 4133.83,3776 4151.41,3793.58 U4.29
  other v5: 3406.4,4021.81
ChrgLED_OUT: J7.6 Q6.1 | length 2182.4
  Top Layer w8: J7.6 1425,3465 1720,3760 1890,3760 1965,3835 1965,3965 1990,3990 2243.63,3990 2313.63,3920 2943.35,3920 3105.75,4082.4 Q6.1
FluidHeater: Q7.3 R46.1 U4.30 | length 700.7
  Top Layer w8: Q7.3 3773.62,3817.6 R46.1 3776.64,3817.86 3933.36,3817.86 v4(3935,3819.5)
  Bottom Layer w8: v4(3935,3819.5) 3940.88,3813.62 4392.13,3813.62 U4.30
  other v5: 3935,3819.5
FluidHeater_OUT: J6.6 Q7.1 | length 2907.8
  Top Layer w8: J6.6 1476.92,3605 1508.92,3637 1557.46,3637 1707.46,3787 1877.46,3787 1935,3844.54 1935,3974.54 1975.46,4015 2250,4015 2315,3950 2890,3950 3130,4190 3385,4190 3477.5,4097.5 3477.5,3887.5 3510,3855 Q7.1
GND: C1.2 C2.1 C3.2 C4.2 C5.2 C6.2 C7.1 C8.2 C9.1 C10.2 C11.2 C12.2 C13.2 C14.2 C15.2 C16.2 C17.2 C18.2 C19.2 C20.2 C21.2 C22.2 C23.1 C24.1 D2.1 D4.1 D6.1 D7.1 D9.1 D10.1 D11.1 D12.1 J1.14 J2.12 J2.14 J3.3 J4.1 J5.1 LED4.2 Q1.2 Q2.2 Q3.2 Q4.2 Q5.2 Q6.2 Q7.2 R1.1 R2.2 R6.2 R11.1 R13.1 R14.2 R15.2 R18.2 R24.2 R28.2 R34.2 R35.2 R45.2 R46.2 S1.1 U1.2 U2.4 U3.2 U4.9 U4.20 U4.25 U4.41 U4.56 U5.2 | length 4495.3
  Top Layer w8: C2.1 R6.2 R1.1 R1.1@1647.29,3895 ; v1(2325,4455) 2328.25,4455 2333.25,4460 R11.1 ; J5.1 3143.6,3435.81 3220.94,3435.81 3231.75,3425 v1(3235,3425) ; Q6.2 3215.1,4119.9 3299.9,4119.9 v1(3300,4120) R45.2 ; v1(3460,3480) 3461.3,3478.7 3541.18,3478.7 D4.1 ; v1(3470,3300) 3471.2,3301.2 3546.28,3301.2 D6.1 ; v1(3520,4030) D11.1 ; C10.2 v1(3765,3515) ; C11.2 v1(3775,3340) ; C12.2@3776.26,3106.63 v1(3776.26,3157.84) ; C21.2 v1(3840,4255) ; C20.2 v1(3845,4070)
  Top Layer w10: v1(1645,4020) 1645.61,4019.39 1684.39,4019.39 R2.2 ; v8@1655.59,3265.59 1752.64,3265.59 J4.1 ; v1(2000,3345) D10.1 ; U1.2 2154.78,3897.2 2175,3876.98 v3(2175,3875) ; C19.2 v1(2345,3305) ; U2.4 v1(2805,4460) ; C7.1 v1(2885,4410) ; Q5.2 3044.95,3730.05 v1(3045,3730) R35.2 ; Q4.2 3067.46,3336.2 3143.8,3336.2 v1(3145,3335) ; v1(3125,2905) S1.1 ; v1(3160,3160) R34.2 ; Q3.2 v1(3295,3946.22) R28.2 ; Q2.2 3292.58,3731.32 3368.68,3731.32 v1(3370,3730) R24.2 ; U5.2 3437.6,2752.6 v1(3440,2755) ; D7.1 v1(3470,3120) 3470.12,3120.12 3548.62,3120.12 D9.1 ; v1(3520,4220) D12.1 ; Q7.2 3697.56,3893.7 3773.7,3893.7 v1(3775,3895) R46.2 ; R15.2 v1(4060,4080) ; C9.1 v1(4400,2805) ; v1(4400,3015) R14.2 ; R18.2 v1(4400,2805) ; R13.1 4442.28,2855 4422.32,2835.04 4422.32,2827.32 v1(4400,2805) ; U3.2 4879.26,2918.03 4887.29,2910 v1(4890,2910) ; J3.3 v1(5200,2725)
  Top Layer w12: v1(1560.74,4260.77) C4.2 ; C3.2 1640.14,4290.49 1640.14,4246.36 v1(1640.74,4245.77) 1642.9,4245.77 1656.68,4231.99 LED4.2 ; v1(1650,4485) 1650.1,4484.9 1719.9,4484.9 Q1.2 ; D2.1 D2.1@2825,4190
  Top Layer w20: D2.1 v1(2875,4155)
  Bottom Layer w8: v6(4268.21,3603.21) 4281.42,3616.42 U4.20 ; U4.25 4465.16,3714.84 v6(4495,3685) ; U4.9 4600.16,3443.78 4605,3438.94 v6(4605,3390) ; U4.41 4619.84,3994.84 4634.34,4009.34 v6(4634.34,4010.66) ; U4.56 4936.91,3714.84 4946.75,3705 v6(4950,3705)
  Bottom Layer w10: v6(2965,2825) 2968.78,2821.22 C24.1 ; C23.1 v6(3725,2760) ; C5.2 4055,4236.65 4081.5,4263.15 4093.15,4263.15 v6(4095,4265) ; C22.2 v6(4095,4265) ; C16.2 4139.1,4224.69 4139.1,4235.9 4110.94,4264.06 4095.94,4264.06 v6(4095,4265) ; C15.2 4215,4040 4225,4030 v6(4252.07,4030) ; C13.2 4215,4234.14 4220.86,4240 v6(4250,4240) ; C8.2 4250,4032.07 v6(4252.07,4030) ; C6.2 v6(4250,4240) ; C1.2 4284.63,4065.85 4284.63,4039.63 4276.21,4031.21 4253.28,4031.21 v6(4252.07,4030) ; C14.2 4285,4234.14 4279.14,4240 v6(4250,4240) ; C17.2 v6(4580,4120) C18.2@4580,4170
  other v8: 1655,3265
GPIOC13: J2.3 U4.47 | length 816.4
  Bottom Layer w8: U4.47 4738.88,3923.45 4738.88,3953.99 4750.42,3965.53 4969.47,3965.53 5152.49,3782.51 5248.53,3686.47 5341.47,3686.47 J2.3
GPIOC14: J2.1 U4.48 | length 793.5
  Bottom Layer w8: U4.48 4961.37,3922.52 5239.82,3644.07 5241.47,3642.42 5241.47,3630 ccw(c5285,3630) 5295.87,3587.85 5295.97,3587.88 5296.05,3587.9 5359.47,3604.47 J2.1
GPIOD0: J2.5 U4.46 | length 812.9
  Bottom Layer w8: U4.46 4718.62,3922.87 4718.62,3949.77 4719.03,3950.18 4719.03,3959.6 4742.97,3983.53 5006.47,3983.53 5203.53,3786.47 5341.47,3786.47 J2.5
GPIOD1: J1.13 U4.49 | length 790
  Bottom Layer w8: U4.49 4828.45,3853.56 4981.44,3853.56 5165,3670 5165,3555 5184.93,3535.07 5339.93,3535.07 5342.27,3532.72 J1.13
GPIOD2: J1.11 U4.50 | length 840.7
  Bottom Layer w8: U4.50 4973.11,3832.95 5145,3661.07 5145,3515 5235,3425 5309.44,3425 5354.44,3380 J1.11
GPIOD3: J1.9 U4.51 | length 914.2
  Bottom Layer w8: U4.51 4828.45,3812.34 4972.51,3812.34 5130,3654.85 5130,3440 5240,3330 5345,3330 J1.9
GPIOD4: J1.7 U4.52 | length 996.6
  Bottom Layer w8: U4.52 4828.45,3792.66 4970.98,3792.66 5110,3653.64 5110,3355 5235,3230 5335,3230 5380.9,3184.1 5390.9,3184.1 J1.7
GPIOD5: J1.5 U4.53 | length 1076
  Bottom Layer w8: U4.53 4828.45,3772.97 4969.45,3772.97 5090,3652.43 5090,3275 5235,3130 5345,3130 J1.5
GPIOD6: J1.3 U4.54 | length 1155.4
  Bottom Layer w8: U4.54 4828.45,3753.29 4967.93,3753.29 5074.71,3646.5 5074.71,3190.29 5235,3030 5304.44,3030 5354.44,2980 J1.3
GPIOD7: J1.1 U4.55 | length 1231.9
  Bottom Layer w8: U4.55 4828.45,3733.6 4966.4,3733.6 5059.71,3640.29 5059.71,3110.29 5235.19,2934.81 5340.19,2934.81 J1.1
GPIOD8: J2.13 U4.42 | length 922.3
  Bottom Layer w8: U4.42 4639.88,3922.87 4639.88,3949.77 4640.29,3950.18 4640.29,3982.68 4748.61,4091 5101,4091 5190,4180 5360,4180 5374.66,4194.66 5374.66,4219.66 J2.13
GPIOD9: J2.11 U4.43 | length 843.2
  Bottom Layer w8: U4.43 4659.21,3976.15 4756.07,4073 5278.24,4073 cw(c5285,4030) 5291.76,4073 5328,4073 J2.11
GPIOD10: J2.9 U4.44 | length 811.8
  Bottom Layer w8: U4.44 4678.9,3970.38 4728.52,4020 5075,4020 5115,3980 5335,3980 J2.9
GPIOD11: J2.7 U4.45 | length 809.9
  Bottom Layer w8: U4.45 4698.93,3922.87 4698.93,3964.96 4735.98,4002 5043,4002 5158.53,3886.47 5341.47,3886.47 J2.7
GROUND: D1.1 J7.4 Q1.1 | length 2205.1
  Top Layer w20: J7.4 1262.47,3332.53 1262.47,3707.51 1309.48,3754.53 1329.53,3754.53 1330.47,3755.47 1350.52,3755.47 1379.53,3784.49 1379.53,3804.53 1390,3815 1390,3980 1526.52,4116.52 1991.52,4116.52 2135,4260 2135,4386.42 D1.1 2135,4393.58 2135,4450 2125,4460 1885,4460 1872.4,4447.4 Q1.1
ILUM: D7.3 J4.4 Q4.3 R34.1 | length 2423.7
  Top Layer w8: J4.4 1830,3290 1795,3325 1605,3325 1585,3305 1585,3145 1635,3095 2200,3095 2274.91,3020.09 2806.35,3020.09 2814.26,3028 2910.46,3028 2977.23,3094.77 2977.23,3112.23 3066.26,3201.26 Q4.3 3147.4,3262.6 3220.06,3189.94 3220.06,3161.91 3221.97,3160 R34.1 3227.72,3160 3230.32,3157.4 D7.3
IMP: C19.1 D10.3 R36.2 R39.2 U4.11 | length 3307.6
  Top Layer w8: R36.2 1867.72,3140 1905,3177.28 R39.2 2136.22,3181.22 2176.26,3221.26 D10.3 2259.69,3307.6 2262.28,3305 C19.1 2267.7,3306.48 2267.7,3332.7 2280,3345 v2(2405,3345) ; C19.1@2268.03,3305 C19.1@2269.94,3306.91 ; v8(2865,3350) 3085,3570 3389.54,3570 3455.54,3636 3934.46,3636 4240.46,3330 v2(4575,3330)
  Bottom Layer w8: v2(2405,3345) 2407.3,3347.3 2862.3,3347.3 v8(2865,3350) ; U4.11 4560.79,3444.73 4556,3439.94 4556,3374 4575,3355 v2(4575,3330)
IMP_IN: J4.3 R39.1 | length 79.9
  Top Layer w10: J4.3 1902.72,3215 1905,3212.72 R39.1
IsFHerror: C21.1 D12.3 R38.2 R41.2 U4.32 | length 932.6
  Top Layer w8: D12.3 3778.94,4182.6 3780,4183.66 C21.1 R41.2 3900,4155 v5(3935,4120)
  Bottom Layer w8: v5(3935,4120) 3935,3980 4062.36,3852.64 U4.32
  other v4: 3935,4120
IsFHerror_IN: J6.5 R41.1 | length 2990.7
  Top Layer w8: J6.5 1574.54,3705 1692.54,3823 1853,3823 1875,3845 1875,3970 1965,4060 2270,4060 2325,4005 2835,4005 3100,4270 3400,4270 3440,4310 3818.94,4310 3900,4228.94 R41.1
IsHeating: C20.1 D11.3 R37.2 R40.2 U4.31 | length 787.3
  Top Layer w8: D11.3 3696.95,3991.91 3793.1,3991.91 3793.62,3992.44 3793.62,3992.6 R37.2 C20.1 R40.2 3895,3949.71 v4(3931.16,3913.55)
  Bottom Layer w8: v4(3931.16,3913.55) 4011.76,3832.95 U4.31
  other v5: 3931.16,3913.55
IsHeating_IN: J7.5 R40.1 | length 3385.7
  Top Layer w8: J7.5 1286.47,3408.53 1286.47,3642.79 1298.69,3655 1550,3655 1700,3805 1870,3805 1905,3840 1905,3970 1975,4040 2260,4040 2320,3980 2855,3980 3110,4235 3400,4235 3515,4120 3828.94,4120 3895,4053.94 R40.1
LightD: Q2.3 R24.1 U4.24 | length 1117.3
  Top Layer w8: Q2.3 3292.07,3657.03 3370,3657.03 3432.03,3657.03 3468,3693 v5(3470,3693)
  Bottom Layer w8: v5(3470,3693) 3472.08,3695.08 4338.8,3695.08 4338.88,3695.16 U4.24
  other v4: 3470,3693
LightD_OUT: D3.1 J5.6 Q2.1 | length 886.5
  Top Layer w8: D3.1 2662.31,3642.69 2662.31,3582.69 2717.5,3527.5 ; J5.6 2865.34,3489.66 2755.34,3489.66 2717.5,3527.5 ; Q2.1 3160.25,3695.25 3040,3575 2765,3575 2717.5,3527.5
LightN: Q3.3 R28.1 U4.27 | length 1280.8
  Top Layer w8: Q3.3 3215.51,3871.93 3293.46,3871.93 3293.98,3871.42 R28.1 3296.22,3871.22 3358.62,3871.22 v5(3359.92,3869.92)
  Bottom Layer w8: v5(3359.92,3869.92) 3360,3869.84 3360,3809.85 3437.85,3732 4140.74,3732 4162.95,3754.21 U4.27
  other v4: 3359.92,3869.92
LightN_OUT: D5.1 J5.7 Q3.1 | length 2063.5
  Top Layer w8: D5.1 D5.1@2110,3655 ; J5.7 2865.34,3464.07 2820.22,3464.07 2812.63,3471.66 2648.34,3471.66 2620,3500 2305,3500 2192.31,3612.69 2141,3612.69 2110,3643.69 D5.1@2110,3655 ; Q3.1 3033.66,3820 2260,3820 2240,3800 2240,3659.69 2235.31,3655 D5.1@2110,3655
LightR: Q5.3 R35.1 U4.28 | length 1558
  Top Layer w8: Q5.3 2960.49,3655.73 3044.51,3655.73 R35.1 3045,3658.03 3046.9,3659.94 3056.7,3659.94 3110,3713.24 3110,3785.31 3114.69,3790 v5(3435,3790)
  Bottom Layer w8: v5(3435,3790) 3475,3790 3515,3750 4133.28,3750 4157.18,3773.9 U4.28
  other v4: 3435,3790
LightR_OUT: D8.1 J5.8 Q5.1 | length 793.9
  Top Layer w8: v8(2720,3420) 2730,3420 2746.62,3436.62 2786.62,3436.62 ; v8(2753.51,3663.51) 2782.65,3692.65 Q5.1 ; D8.1 2775,3425 2786.62,3436.62 ; J5.8 2786.62,3436.62
  Bottom Layer w8: v8(2720,3420) 2720,3630 v8(2753.51,3663.51)
MCLR: J3.1 R44.1 U4.7 | length 2586.4
  Top Layer w8: R44.1 3690,2875 3710,2895 4211.67,2895 4275,2831.67 4275,2800 4365,2710 4730,2710 4795,2645 J3.1 5000,2705 v2(4990,2715)
  Bottom Layer w8: U4.7 4640.45,3486.55 4640.45,3454.55 4725,3370 4725,2855 4760,2820 4970,2820 4990,2800 v2(4990,2715)
NetC2_2: C2.2 R3.2 R8.2 R9.2 | length 237.7
  Top Layer w10: C2.2 1565,3928.78 1580,3943.78 1601.06,3943.78 R9.2@1602.29,3945 ; R3.2 1600,3947.28 R9.2@1602.29,3945 ; R8.2 R9.2@1602.29,3945
NetC7_2: C7.2 U2.3 | length 86.7
  Top Layer w10: U2.3 C7.2
NetC9_2: C9.2 R16.2 R19.2 R20.2 | length 400.5
  Top Layer w8: v2(4350,3010) 4400,2960 R19.2 R20.2 4402.28,2900 4400,2897.72 C9.2 ; v2(4350,3085) 4400,3085 4413.1,3071.9 4435.38,3071.9 4437.28,3070 R16.2
  Bottom Layer w8: v2(4350,3010) v2(4350,3085)
NetC17_1: C17.1 U4.39 Y1.2 | length 267.8
  Bottom Layer w8: U4.39@4580,3922.99 4580.12,3923.11 4580.12,3949.77 4580,3949.88 C17.1 4580,4048.03 4581.91,4049.94 4591.71,4049.94 4620,4078.23 4620,4108.67 4631.33,4120 Y1.2
NetC18_1: C18.1 U4.40 Y1.1 | length 524
  Bottom Layer w8: C18.1 4611.31,4203.78 4616.35,4198.74 Y1.1 4735.31,4198.74 4740,4194.06 4740,4107.84 4698.16,4066 4646,4066 4600.16,4020.16 U4.40
NetC24_2: C24.2 D14.1 R43.1 S1.2 U5.3 | length 1158.4
  Top Layer w8: v2(2895,2775) D14.1 2805,2862 2913,2970 3014.85,2970 3028.85,2984 3361,2984 S1.2 3440,2805.16 ; U5.3 3424.84,2790 3440,2805.16 ; R43.1 3449.84,2815 3440,2805.16
  Bottom Layer w8: v2(2895,2775) C24.2
NetD2_2: D2.2 L1.1 U2.2 | length 964.6
  Top Layer w8: D2.2 2502.31,4167.31 2502.31,4237.31 2520,4255 2785,4255 2840,4310 2840,4345 2855,4360 ; U2.2 2855,4360 ; L1.1 3162.56,4428.03 3094.53,4360 2855,4360
NetD3_2: D3.2 R21.2 | length 386.7
  Top Layer w8: D3.2 2342.31,3662.69 2402.31,3662.69 2447.5,3617.5 v8(2447.5,3547.5) ; v8(2450,3445) 2480,3415 R21.2
  Bottom Layer w8: v8@2445,3550 v8(2447.5,3547.5) 2450,3545 v8(2450,3445)
NetD5_2: D5.2 R25.2 | length 220.9
  Top Layer w8: D5.2 1816.22,3628.78 R25.2
NetD8_2: D8.2 R29.2 | length 389
  Top Layer w8: D8.2 2475,3095 2530,3040 R29.2
NetLED1_2: LED1.2 R5.1 | length 50
  Bottom Layer w8: LED1.2 R5.1
NetLED2_2: LED2.2 R15.1 | length 55
  Top Layer w8: R15.1 LED2.2
NetLED3_2: LED3.2 R17.1 | length 48.1
  Bottom Layer w8: R17.1 LED3.2
NetLED4_1: LED4.1 R12.2 | length 42.4
  Top Layer w12: LED4.1 R12.2
NetLED5_2: LED5.2 R30.1 | length 40.5
  Bottom Layer w8: LED5.2 4508.78,4137.56 R30.1
NetQ1_3: Q1.3 R10.2 | length 126.2
  Top Layer w10: R10.2 1595.91,4407.9 1598.03,4407.9 1600.13,4410 Q1.3
NetQ4_1: Q4.1 R21.1 R25.1 R29.1 | length 1754.6
  Top Layer w8: R25.1 2295,3445 2344.91,3395.09 2535.64,3395.09 2543.84,3403.3 2543.84,3413.09 2545.75,3415 R21.1 2615,3415 2634.69,3395.31 2634.69,3094.69 2639.37,3090 2746.68,3090 2778.78,3057.9 R29.1 2800.8,3040 2806.8,3046 2900.31,3046 2905,3050.69 2905,3290.31 2909.69,3295 2968.74,3295 Q4.1
NetR3_1: R3.1 U1.5 | length 300.2
  Top Layer w8: R3.1 1600,4055.31 1604.69,4060 1705.31,4060 1710,4055.31 1710,3975 1736.15,3948.85 1786.74,3948.85 U1.5
NetR4_1: R4.1 U2.1 U2.7 U2.8 | length 538.4
  Top Layer w20: R4.1 2351.61,4172.56 2403.42,4224.37 2403.42,4251.81 2441.61,4290 2498.04,4290 2518.04,4310 U2.8 ; U2.7 U2.8 ; U2.1 U2.8
NetR6_1: R6.1 U1.8 | length 117.4
  Top Layer w8: R6.1 1682.71,3850 1704.33,3871.61 U1.8
NetR7_2: R7.2 R11.2 U2.5 | length 571.3
  Top Layer w10: R11.2 U2.5 2610,4460 2660,4510 2887.28,4510 2967.28,4430 R7.2
NetR16_1: R16.1 U3.5 | length 159.9
  Top Layer w10: R16.1 4495,3070 4546.97,3018.03 U3.5
NetR18_1: R18.1 U3.8 | length 174.1
  Top Layer w8: R18.1 4500,2805 4538.03,2843.03 4538.03,2868.03 U3.8
NetR30_2: R30.2 U4.37 | length 201.6
  Bottom Layer w8: R30.2 4510,4006.06 4541.1,3974.96 U4.37
NetR33_2: R33.2 U4.8 | length 2055.2
  Top Layer w8: v5(3040,2890) 3042.5,2887.5 3042.5,2821.28 R33.2 ; v2(4280,3280) 4596.75,3280 4601.75,3285 v2(4605,3285)
  Bottom Layer w8: v5(3040,2890) 3040,2937.67 3117.33,3015 3890,3015 4155,3280 v2(4280,3280) ; v2(4605,3285) 4640,3320 4640,3429.4 4620.19,3449.2 4620.19,3487.13 U4.8
  other v4: 3040,2890
PGC: J3.5 U4.17 | length 1984
  Top Layer w8: v5(4315,2880) 4315,2877.67 4340,2852.67 4340,2795 4387,2748 4722.54,2748 4759.54,2785 5260,2785 J3.5
  Bottom Layer w8: v5(4315,2880) 4315,3525 4347.36,3557.36 U4.17
  other v4: 4315,2880
PGD: J3.4 U4.18 | length 2043
  Top Layer w8: v8(4180,2950) 4320,2810 4320,2785 4375,2730 4730,2730 4765,2765 5193.94,2765 5250.09,2708.86 5250.09,2694.91 J3.4 ; v2(4225,3210) v2(4225,3310)
  Bottom Layer w8: v8(4180,2950) 4180,3165 v2(4225,3210) ; v2(4225,3310) 4225,3460.46 4341.59,3577.05 U4.18
RESET: C23.2 D13.1 R42.2 R44.2 U5.1 | length 775.1
  Top Layer w12: U5.1 3389.69,2710 3590,2710 ; R44.2 3615,2875 3591.22,2851.22 R42.2 3590.09,2805 3590,2804.9 3590,2760 3590,2710 ; D13.1 3889.03,2764.03 3824.03,2764.03 3770,2710 3590,2710
  Bottom Layer w12: v2@3590,2760 C23.2
  other v2: 3588.78,2760
RX: J2.10 U4.34 | length 927.5
  Top Layer w8: v2(4470,4030) J2.10
  Bottom Layer w8: v2(4470,4030) 4470,4026.75 4482.05,4014.7 U4.34
TX: J2.8 U4.33 | length 1103
  Top Layer w8: v2(4380,3995) 4380,3955 4405,3930 J2.8
  Bottom Layer w8: v2(4380,3995) 4450,3995 4462.36,3982.64 U4.33
WDI: R33.1 U5.4 | length 245.5
  Top Layer w8: R33.1 3046.22,2790 U5.4
pads on no net: J6.4 U4.1 U4.2 U4.3 U4.4 U4.5 U4.6 U4.35 U4.36 U4.62 U4.63 U4.64 U5.6

## Polygon pours and split planes (outlines as drawn)
GND on GND (split plane): 3390.79,4345.79 3393.83,4343.29 3397.31,4341.43 3401.08,4340.29 3405,4339.9 5411.68,4339.9 5519.9,4231.68 5519.9,2540.1 2368.32,2540.1 2029.21,2879.21 2026.17,2881.71 2022.69,2883.57 2018.92,2884.71 2015,2885.1 1163.32,2885.1 980.1,3068.32 980.1,4141.68 1378.32,4539.9 3196.68,4539.9
+5V on +5V (split plane): 3390.79,4345.79 3393.83,4343.29 3397.31,4341.43 3401.08,4340.29 3405,4339.9 5411.68,4339.9 5519.9,4231.68 5519.9,2540.1 2368.32,2540.1 2029.21,2879.21 2026.17,2881.71 2022.69,2883.57 2018.92,2884.71 2015,2885.1 1163.32,2885.1 980.1,3068.32 980.1,4141.68 1378.32,4539.9 3196.68,4539.9

## Silkscreen, mask and mechanical layers (free items; w line width, h text height)
Top Overlay:
  text "Sobczak Sosnowski" at 4475,2115 h60

## Text inside footprints (layer, text, board x,y; h text height)
J1: Top Overlay "2" at 5315,2760 h50 r90; Top Overlay "1" at 5415,2760 h50 r90; Top Overlay "14" at 5315,3560 h50 r90; Top Overlay "13" at 5415,3560 h50 r90
J2: Top Overlay "2" at 5305,3510 h50 r90; Top Overlay "1" at 5405,3510 h50 r90; Top Overlay "14" at 5305,4310 h50 r90; Top Overlay "13" at 5405,4310 h50 r90